# Altium PCB Jammer Circuit.PcbDoc
Units mil, origin at the board's own origin, x right, y up, seen from the top; angles counter-clockwise.
Board outline 2755.91 x 4724.41 mil, 2 copper layers (Top Layer, Bottom Layer); 52 components, 26 nets, 189 pads, 29 vias.
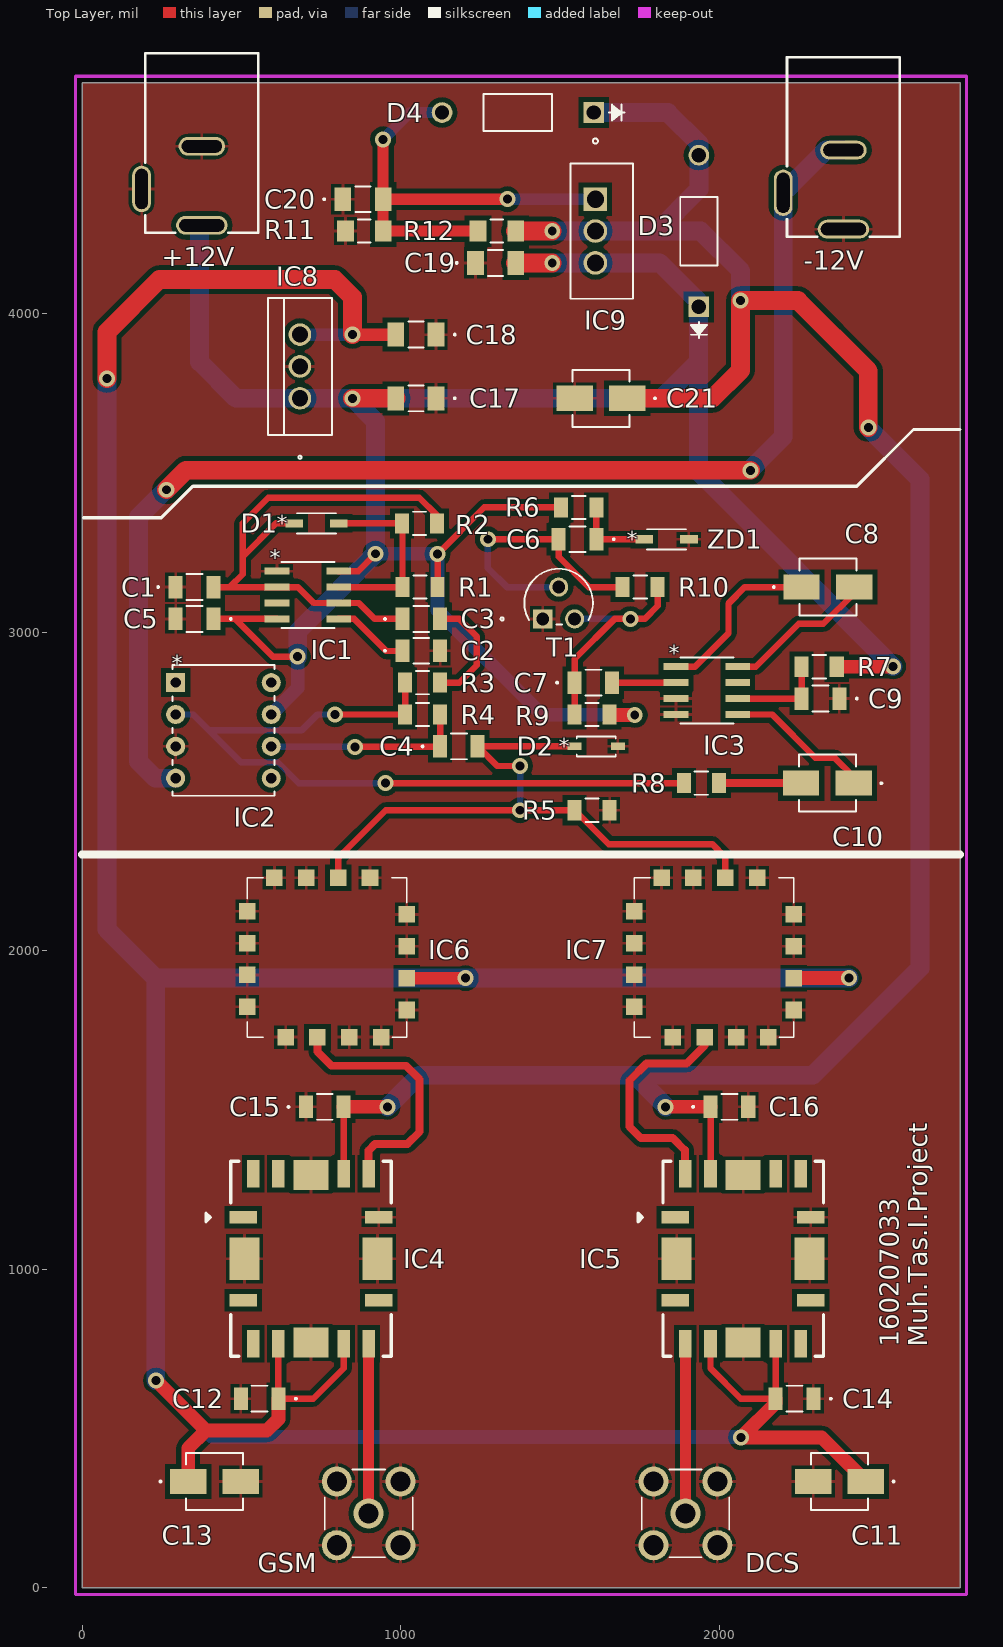
[diagram p0: Top Layer view]
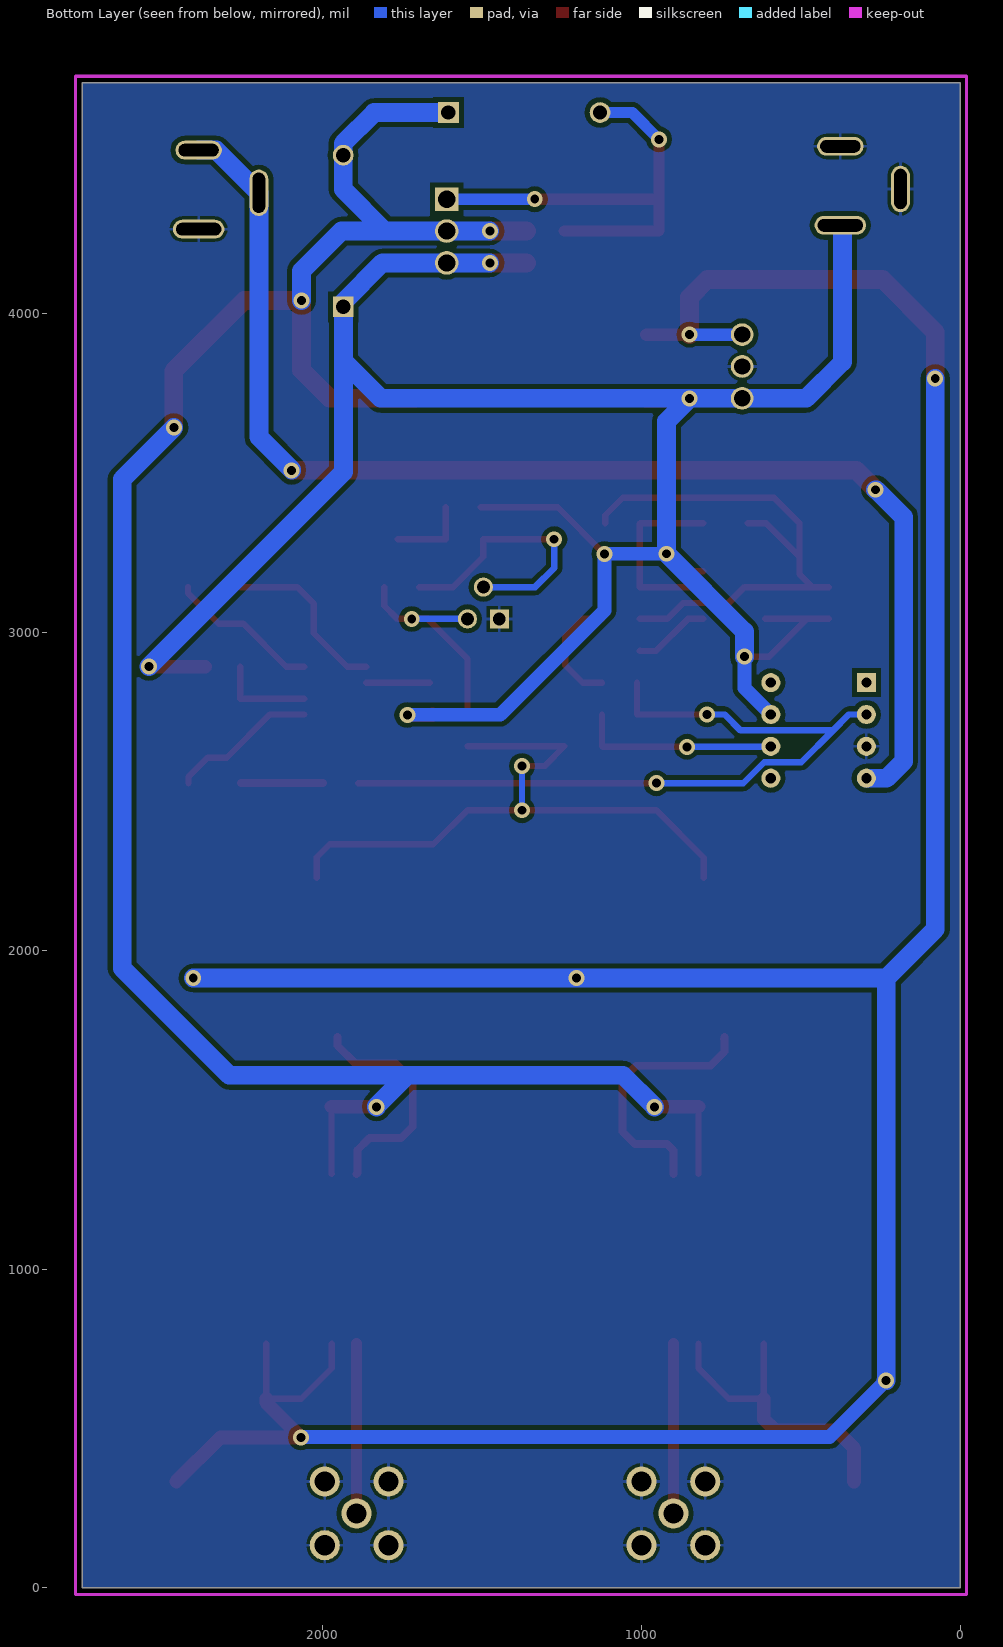
[diagram p1: Bottom Layer view, seen from below]
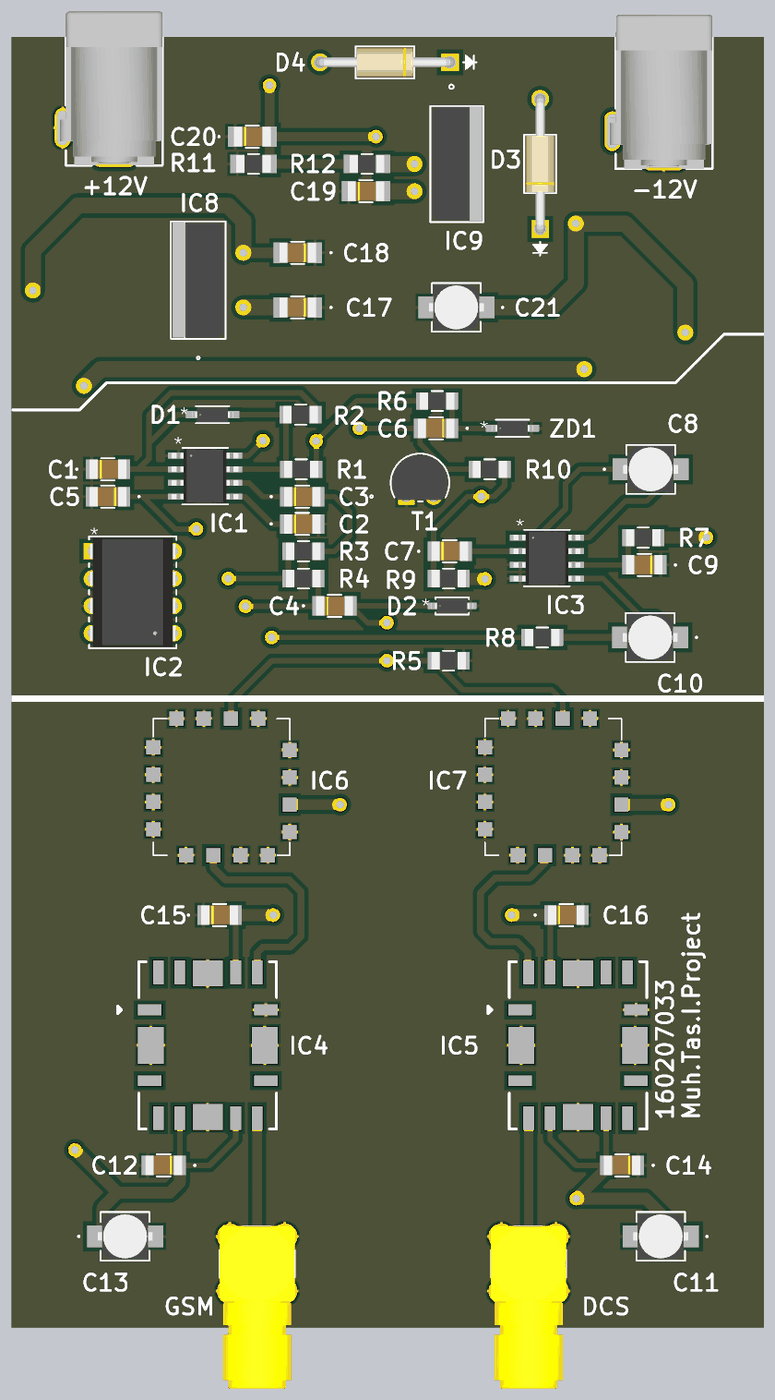
[diagram p2: 3D render of the assembled board from above, using the file's embedded part models]

## Layer stack, top to bottom
Top Solder: solder mask 0.4, Solder Resist, Dk 3.5
Top Layer: signal copper 1.4
Dielectric 1: dielectric 12.6, FR-4, Dk 4.8
Bottom Layer: signal copper 1.4
Bottom Solder: solder mask 0.4, Solder Resist, Dk 3.5

## Board outline
0,0 0,4724.41 2755.91,4724.41 2755.91,0

## Design rules (kind name [scope] priority, off if disabled: settings)
Clearance [All] p1: gap=10 ignorepadtopadclearanceinfootprint=FALSE except(0: Arc-Hole Track-Hole SMDPad-Hole THPad-Hole Via-Hole Fill-Hole Poly-Hole Region-Hole Text-Hole; 15: Arc-Poly Track-Poly SMDPad-Poly THPad-Poly Via-Poly Fill-Poly Poly-Poly Poly-Region Poly-Text)
PolygonConnect [All] p1: connectstyle=Relief reliefconductorwidth=10 reliefentries=4 polygonreliefangle="90 Angle" airgapwidth=10
RoutingVias [All] p1: holewidth=28 width=50 viastyle="Through Hole" minholewidth=28 minwidth=50 maxholewidth=28 maxwidth=50
SolderMaskExpansion [All] p1: expansion=4
Width GND [InNet('GND')] p1: maxlimit=78.74 minlimit=39.37 preferedwidth=43.31 minimp=50.000000 maximp=50.000000 favimp=50.000000
Width +12V [InNet('+12')] p2: maxlimit=59.06 minlimit=20 preferedwidth=43.31 minimp=50.000000 maximp=50.000000 favimp=50.000000
Width -12V [InNet('-12')] p3: maxlimit=59.06 minlimit=20 preferedwidth=43.31 minimp=50.000000 maximp=50.000000 favimp=50.000000
Width +5V [InNet('+5')] p4: maxlimit=59.06 minlimit=20 preferedwidth=43.31 minimp=50.000000 maximp=50.000000 favimp=50.000000
Width +2V2 [InNet('+2.2')] p5: maxlimit=59.06 minlimit=20 preferedwidth=43.31 minimp=50.000000 maximp=50.000000 favimp=50.000000
Width Default [All] p6: maxlimit=35 minlimit=20 preferedwidth=25 minimp=50.000000 maximp=50.000000 favimp=50.000000
30 further rules are at their usual default settings.

## Classes and differential pairs
component class "Power Circuit": +12V -12V C17 C18 C19 C20 D3 D4 IC8 IC9 R11 R12
component class "Jammer Circuit": C1 C2 C3 C4 C5 C6 C7 C8 C9 C11 C12 C13 C14 C15 C16 D1 D2 DCS GSM IC1 IC2 IC3 IC4 IC5 IC7 R1 R2 R3 R4 R5 R6 R7 R8 R9 R10 T1 ZD1

## Components (designator, comment, footprint, x,y, rotation, side; value= is the part's Value field where it differs from the comment)
+12V "DCJ250-10-A_XX-X_revA" DCJ250-10-A_XX-X_revA 376,4534.87 r180 top (schematic designator CON3)
-12V "DCJ250-10-A_XX-X_revA" DCJ250-10-A_XX-X_revA 2390,4522.87 r180 top (schematic designator CON4)
C1 "12062A270JAT2A" CAP_1206J 353,3141.52 r0 top value="0.1 µF"
C2 "12062A270JAT2A" CAP_1206J 1065,2941.52 r0 top value="1 nF"
C3 "12062A270JAT2A" CAP_1206J 1065,3041.52 r0 top value="0.1 µF"
C4 "12062A270JAT2A" CAP_1206J 1183,2641.52 r0 top value="0.1 µF"
C5 "12062A270JAT2A" CAP_1206J 353,3041.52 r180 top value="0.1 µF"
C6 "12062A270JAT2A" CAP_1206J 1555.17,3291.52 r180 top value="0.1 µF"
C7 "12062A270JAT2A" CAP_1206J 1605.17,2841.52 r0 top value="0.1 µF"
C8 "EEE-1CA221UP" CHEMI-D55-M 2341,3141.52 r0 top value="10 µF"
C9 "12062A270JAT2A" CAP_1206J 2318,2791.52 r180 top value="0.1 µF"
C10 "EEE-1CA221UP" CHEMI-D55-M 2339.5,2526 r180 top value="10 µF"
C11 "EEE-1CA221UP" CHEMI-D55-M 2377.96,334 r180 top value="4.7 µF"
C12 "12062A270JAT2A" CAP_1206J 557.28,594 r180 top value="100 pF"
C13 "EEE-1CA221UP" CHEMI-D55-M 415.78,334 r0 top value="4.7 µF"
C14 "12062A270JAT2A" CAP_1206J 2236.46,594 r180 top value="100 pF"
C15 "12062A270JAT2A" CAP_1206J 762,1510 r0 top value="100 pF"
C16 "12062A270JAT2A" CAP_1206J 2032.17,1510 r0 top value="100 pF"
C17 "12062A270JAT2A" CAP_1206J-M 1048.17,3734 r180 top value="0.33 µF"
C18 "12062A270JAT2A" CAP_1206J-M 1048.17,3934 r180 top value="0.1 µF"
C19 "12062A270JAT2A" CAP_1206J-M 1298,4159 r0 top value="0.1 µF"
C20 "12062A270JAT2A" CAP_1206J-M 882,4359 r0 top value="10 µF"
C21 "EEE-1CA221UP" CHEMI-D55-M 1629,3734 r180 top value="1 µF"
D1 "1N4148" SOD123-M 736.09,3341.52 r0 top
D2 "1N4148" SOD123 1614.09,2641.52 r0 top
D3 "1N4002" DO-204AL 1936.17,4259 r90 top value=Value
D4 "1N4002" DO-204AL 1368,4631 r180 top value=Value
DCS "SMA-J-P-H-RA-TH1" SAMTEC_SMA-J-P-H-RA-TH1 1894.09,234 r90 top (schematic designator CON1)
GSM "SMA-J-P-H-RA-TH1" SAMTEC_SMA-J-P-H-RA-TH1 899.74,234 r90 top (schematic designator CON2)
IC1 "NE555" D8 709,3116.52 r0 top value=Value
IC2 "LM741" J08A 594,2541.52 r0 top value=Value
IC3 "LM386" M08A 1961.17,2816.52 r0 top value=Value
IC4 "PF08109B" PCBComponent_1 718.64,1033.19 r90 top
IC5 "PF08109B" PCBComponent_1 2075.1,1033.19 r90 top
IC6 "CVCO55CL-0925-0970" XTAL_CVCO55CW-0925-970 519,2229 r270 top
IC7 "CVCO55BE-1785-1900" XTAL_CVCO55CW-0925-970 1734,2229 r270 top
IC8 "LM7805CT" TO-220 684,3934 r90 top value=Value
IC9 "LM317AT" T03B 1611.35,4259 r270 top value=Value
R1 "RC1206JR-071M1L" RC1206N 1061,3141.52 r180 top value="250 ?"
R2 "RC1206JR-071M1L" RC1206N 1059,3341.52 r0 top value="750 ?"
R3 "RC1206JR-071M1L" RC1206N 1069,2841.52 r0 top value="2 K?"
R4 "RC1206JR-071M1L" RC1206N 1069,2741.52 r0 top value="2 K?"
R5 "RC1206JR-071M1L" RC1206N 1601.17,2441 r0 top value="100 K?"
R6 "RC1206JR-071M1L" RC1206N 1559.17,3391.52 r0 top value="2 K?"
R7 "RC1206JR-071M1L" RC1206N 2314,2891.52 r180 top value="10 ?"
R8 "RC1206JR-071M1L" RC1206N 1944,2526 r0 top value="1 K?"
R9 "RC1206JR-071M1L" RC1206N 1601.17,2741.52 r180 top value="1 K?"
R10 "RC1206JR-071M1L" RC1206N 1752,3141.52 r180 top value="2 K?"
R11 "RC1206JR-071M1L" RC1206N-M 886,4259 r180 top value="180 ?"
R12 "RC1206JR-071M1L" RC1206N-M 1302,4259 r180 top value="240 ?"
T1 "2N3904" TO-92_2 1496.17,3091.52 r0 top value=Value
ZD1 "6V8" SOD123-M 1834.91,3291.52 r0 top value=Value

## Footprints (in the part's own frame and the unit in brackets; to place one, negate y for a bottom-side part, rotate by r counter-clockwise, add the part's x,y. Pads: shape width x height; smd on the part's side, far side on the other; paste and mask are expansions set on the pad)
CAP_1206J [mil]
  rect 44x71 smd paste+0 mask+0: 1(-59,0) 2(59,0)
  silkscreen extent -117,-40 25,40, body extent -67,-36 67,36, height 37
CAP_1206J-M [mil]
  rect 52x75 smd paste+0 mask+0: 1(-63,0) 2(63,0)
  silkscreen extent -125,-40 24,40, body extent -67,-36 67,36, height 37
CHEMI-D55-M [mil]
  rect 114x79 smd paste+0 mask+0: 1(-82.5,0) 2(82.5,0)
  silkscreen extent -172,-90 90,89, body extent -101,-84 101,84, height 207
D8 [mil]
  rect 78x22 smd paste+0 mask+0: 1(-97,75) 2(-97,25) 3(-97,-25) 4(-97,-75) 5(97,-75) 6(97,-25) 7(97,25) 8(97,75)
  silkscreen extent -84,-104 84,103, body extent -122,-99 122,99, height 69
DCJ250-10-A_XX-X_revA [mm] "DC Power Jack, Thru-Hole, Horizontal, with Locating Pegs, D2.5mm"
  oval 4.1x1.5 hole 1 slot 3.6 at 0 deg: 1(0,6.55)
  oval 3.7x1.5 hole 1 slot 3.2 at 0 deg: 2(0,0.25)
  oval 1.5x3.7 hole 1 slot 3.2 at 90 deg: 3(4.8,3.65)
  silkscreen extent -4.5,-7.15 4.5,7.15, body extent -4.5,-7.15 5.05,7.15, height 11
DO-204AL [mil]
  rect 65x65 hole 45 mask+0: 1(-238,0)
  round 65 hole 45 mask+0: 2(238,0)
  silkscreen extent -336,-59 108,59, body extent -255,-54 255,53, height 157
J08A [mil]
  rect 60x60 hole 32 mask+0: 1(-300,300)
  round 60 hole 32 mask+0: 2(-300,200) 3(-300,100) 4(-300,0) 5(0,0) 6(0,100) 7(0,200) 8(0,300)
  silkscreen extent -310,-55 10,355, body extent -307,-50 7,350, height 250
M08A [mil]
  rect 78x22 smd paste+0 mask+0: 1(-97,75) 2(-97,25) 3(-97,-25) 4(-97,-75) 5(97,-75) 6(97,-25) 7(97,25) 8(97,75)
  silkscreen extent -84,-104 84,104, body extent -122,-99 122,99, height 69
PCBComponent_1 [mm]
  rect 1x2.2 smd: 1(3.3,5.4) 2(-3.3,5.4) 7(-3.3,-5.4) 8(3.3,-5.4)
  rect 2.2x1 smd: 3(-6.775,4.6) 4(-6.775,2.6) 5(-6.775,-2.6) 6(-6.775,-4.6) 9(6.775,-4.6) 10(6.775,-2.6) 11(6.775,2.6) 12(6.775,4.6)
  rect 2.4x2.8 smd: GND(-6.675,0) GND(6.675,0)
  rect 3.4x2.4 smd: GND(0,5.3) GND(0,-5.3)
  silkscreen extent -7.77,-6.4 7.78,8.38, body extent -7.65,-6.27 7.65,6.28, height 1.8
RC1206N [mil]
  rect 44x63 smd paste+0 mask+0: 1(-55,0) 2(55,0)
  silkscreen extent -21,-36 21,36, body extent -63,-31 63,31, height 28
RC1206N-M [mil]
  rect 52x67 smd paste+0 mask+0: 1(-59,0) 2(59,0)
  silkscreen extent -20,-36 20,36, body extent -63,-31 63,31, height 28
SAMTEC_SMA-J-P-H-RA-TH1 [mm]
  round 2.4 hole 1.6: 1(0,0) 2(2.54,-2.54) 3(2.54,2.54) 4(-2.54,2.54) 5(-2.54,-2.54)
  silkscreen extent -3.5,-3.5 3.5,3.5, body extent -11.6,-3.5 3.5,3.5, height 11.12
SOD123 [mm]
  rect 1.111x0.601 smd paste+0 mask+0: 1(-1.725,0) 2(1.725,0)
  silkscreen extent -1.55,-0.8 1.55,0.8, body extent -1.92,-0.67 1.93,0.68, height 0.81
SOD123-M [mil]
  rect 55.75x25.65 smd paste+0 mask+0: 1(-69.91,0) 2(69.91,0)
  silkscreen extent -61,-32 61,32, body extent -76,-27 76,27, height 32
T03B [mil]
  rect 74x74 hole 54: 1(-100,0)
  round 74 hole 54: 2(0,0) 3(100,0)
  silkscreen extent -290,-78 213,118, body extent -207,-72 207,113, height 870
TO-92_2 [mil]
  rect 60x60 hole 40 mask+0: 1(-50,-50)
  round 60 hole 40 mask+0: 2(0,50) 3(50,-50)
  silkscreen extent -182,-68 108,107, body extent -103,-65 103,103, height 360
TO-220 [mil]
  round 71 hole 51 mask+0: 1(-200,0) 2(-100,0) 3(0,0)
  silkscreen extent -390,-100 115,100, body extent -310,-95 110,95, height 750
XTAL_CVCO55CW-0925-970 [mm]
  rect 1.32x1.32 smd: 1(0,9.779) 1(0,4.699) 1(0,2.159) 1(2.667,0) 1(2.921,12.7) 1(5.207,0) 1(5.461,12.7) 1(7.747,0) 1(10.287,0) 1(10.541,12.7) 1(12.7,8.128) 1(12.7,10.668) 1(12.7,3.048) 2(0,7.239) 10(12.7,5.588) 14(8.001,12.7)
  silkscreen extent -1.95,0 12.7,12.7, body extent 0,0 12.7,12.7, height 3.81

## Part data
+12V -12V: "DC Power Jack, Thru-Hole, Horizontal, with Locating Pegs, D2.5mm"
C1 C2 C3 C4 C5 C6 C7 C9 C12 C14 C15 C16 C17 C18 C19 C20 IC8 IC9 R1 R2 R3 R4 R5 R6 R7 R8 R9 R10 R11 R12 T1: "Imported", Built_By=EMA_UL_Team, RefDes=RefDes, Type=DEV
  C1 C2 C3 C4 C5 C6 C7 C9 C12 C14 C15 C16 C17 C18 C19 C20: Manufacturer_Part_Number=12062A270JAT2A, Vendor="AVX Corporation"
  IC8: C="Copyright (C) 2015 Accelerated Designs. All rights reserved", Manufacturer_Part_Number=LM7805CT, Vendor="Fairchild Semiconductor"
  IC9: C="Copyright (C) 2015 Accelerated Designs. All rights reserved", Manufacturer_Part_Number=LM317AT, Vendor="Texas Instruments"
  R1 R2 R3 R4 R5 R6 R7 R8 R9 R10 R11 R12: C="Copyright (C) 2015 Accelerated Designs. All rights reserved", Manufacturer_Part_Number=RC1206JR-071M1L, Vendor=Yageo
  T1: C="Copyright (C) 2015 Accelerated Designs. All rights reserved", Manufacturer_Part_Number=2N3904, Vendor="Fairchild Semiconductor"
C8 C10 C11 C13 C21: "Imported", Voltage=16V, C="Copyright (C) 2015 Accelerated Designs. All rights reserved", Copyright="Copyright (C) 2015 Accelerated Designs. All rights reserved", Manufacturer_Part_Number=EEE-1CA221UP, RefDes=RefDes, Type=DEV, Vendor=Panasonic
D1 D2: library part 1N4148W-13-F, Built_By=EMA_UL_Team, C="Copyright (C) 2015 Accelerated Designs. All rights reserved", Manufacturer_Part_Number=1N4148W-13-F, RefDes=RefDes, Type=DEV, Vendor="Diodes Inc"
D3 D4: library part 1N4002-E3/73, "Imported", Built_By=EMA_UL_Team, C="Copyright (C) 2015 Accelerated Designs. All rights reserved", Manufacturer_Part_Number=1N4002-E3/73, RefDes=RefDes, Type=DEV, Vendor=Vishay
DCS GSM: "Conn SMA F 0Hz to 6GHz 50Ohm Solder RA Thru-Hole Gold Tray", Package=None, Availability=Unavailable, MF="Samtec Inc.", MP=SMA-J-P-H-RA-TH1, Price=None, SnapEDA_Link=https://www.snapeda.com/parts/SMA-J-P-H-RA-TH1/Samtec%20Inc./view-part/?ref=snap
IC1: library part NE555DRG4, "Imported", Manufacturer="Texas Instruments", Built_By=EMA_UL_Team, C="Copyright (C) 2015 Accelerated Designs. All rights reserved", Manufacturer_Part_Number=NE555DRG4, RefDes=RefDes, Type=DEV, Vendor="Texas Instruments"
IC2: library part LM741J, "Imported", Built_By=EMA_UL_Team, C="Copyright (C) 2015 Accelerated Designs. All rights reserved", Manufacturer_Part_Number=LM741J, RefDes=RefDes, Type=DEV, Vendor="Texas Instruments"
IC3: library part LM386M-1/NOPB, "Imported", Built_By=EMA_UL_Team, C="Copyright (C) 2015 Accelerated Designs. All rights reserved", Manufacturer_Part_Number=LM386M-1/NOPB, RefDes=RefDes, Type=DEV, Vendor="Texas Instruments"
IC4 IC5: library part Amplifier
IC6: "Oscillator, VCO; Type, Narrow Band; 925-970MHz; 12.7x12.7mm SMD", Package="QFN-16 Crystek Crystals", Availability=Unavailable, MF="Crystek Corporation", MP=CVCO55CL-0925-0970, Price=None, SnapEDA_Link=https://www.snapeda.com/parts/CVCO55CL-0925-0970/Crystek%20Corporation/view-part/?ref=snap
IC7: library part CVCO55CL-0925-0970, "Oscillator, VCO; Type, Narrow Band; 925-970MHz; 12.7x12.7mm SMD", Package="QFN-16 Crystek Crystals", Availability=Unavailable, MF="Crystek Corporation", MP=CVCO55CL-0925-0970, Price=None, SnapEDA_Link=https://www.snapeda.com/parts/CVCO55CL-0925-0970/Crystek%20Corporation/view-part/?ref=snap
ZD1: library part MMSZ5221B-7, Built_By=EMA_UL_Team, C="Copyright (C) 2015 Accelerated Designs. All rights reserved", Manufacturer_Part_Number=MMSZ5221B-7, RefDes=RefDes, Type=DEV, Vendor="Diodes Inc"

## Via types
v1: diameter 50, hole 28, Top Layer to Bottom Layer, 29 vias

## Nets (pads, with @x,y where several pads share a name; then routed paths per layer and width w, separated by ;. In a path a pad name is that pad's centre, name@x,y a point inside that pad or via, vN(x,y) a via of type N, cw(c..) or ccw(c..) an arc to the next point about the centre after c; other vN are vias at no path point)
+2.2: C15.2 C16.1 C21.1 D3.2 D4.1 IC4.10 IC5.11 IC9.2 R12.1 | length 7285.9
  Top Layer w20: IC4.10 C15.2 ; IC5.11 1973.17,1300.35 C16.1
  Top Layer w43.31: C15.2 v1(959,1510) ; v1(1832,1510) C16.1
  Top Layer w59.06: R12.1 v1(1476,4259) ; C21.1 1979,3734 2067,3822 v1(2067,4041) 2247,4041 2468,3820 v1(2468,3642)
  Bottom Layer w59.06: v1(959,1510) 1058,1609 1735,1609 ; v1(1476,4259) IC9.2 1805,4259 ; D4.1 1839.17,4631 1936.17,4534 D3.2 1936.17,4390.17 1805,4259 ; v1(1832,1510) 1832,1512 1735,1609 ; v1(2067,4041) 2067,4134 1942,4259 1805,4259 ; v1(2468,3642) 2630,3480 2630,1945 2294,1609 1735,1609
+5: C11.1 C12.1 C13.1 C14.2 C18.2 IC4.4 IC4.5 IC5.4 IC5.5 IC6.14 IC7.14 IC8.3 | length 11393.2
  Top Layer w20: IC4.4 C12.1 725.68,594 821,689.32 IC4.5 ; IC5.4 1972.74,689.32 2068.06,594 C14.2 IC5.5
  Top Layer w39.37: v1(849,3934) C18.2 ; IC6.14 v1(1204,1914)
  Top Layer w43.31: v1(232.28,650.59) 388.78,494.09 ; C13.1 333.28,438.59 388.78,494.09 ; C12.1 616.28,530.65 579.72,494.09 388.78,494.09 ; C14.2 2177.46,581.01 v1(2068.9,472.44) 2322.02,472.44 C11.1 ; IC7.14 v1(2407,1914)
  Top Layer w59.06: v1(78,3796) 78,3942 243,4107 793,4107 849,4051 v1(849,3934)
  Bottom Layer w39.37: IC8.3 v1(849,3934)
  Bottom Layer w43.31: v1(232.28,650.59) 409.45,473.43 2067.91,473.43 v1(2068.9,472.44)
  Bottom Layer w59.06: v1(78,3796) 78,3647 78,2067.67 231.67,1914 ; v1(232.28,650.59) 231.67,651.2 231.67,1914 ; v1(2407,1914) v1(1204,1914) 231.67,1914
+12: +12V.1 C5.1 C17.2 C19.2 D3.1 IC1.4 IC1.8 IC2.7 IC8.1 IC9.3 R1.1 R6.1 R7.1 R9.1 | length 7930.3
  Top Layer w20: C5.1 481,3041.52 ; IC1.4 481,3041.52 ; v1(677,2923) 599.52,2923 481,3041.52 ; IC1.8 866.52,3191.52 v1(921,3246) ; R1.1 v1(1116,3245) 1262.52,3391.52 R6.1
  Top Layer w43.31: R9.1 1657.69,2740 v1(1735,2740) ; R7.1 2545.52,2891.52 v1(2546,2892)
  Top Layer w59.06: v1(849,3734) C17.2 ; C19.2 v1(1476,4159)
  Bottom Layer w43.31: IC2.7 677,2824.52 v1(677,2923) ; v1(921,3246) 1115,3246 v1(1116,3245) 1116,3068 1443,2741 1734,2741 v1(1735,2740)
  Bottom Layer w59.06: +12V.1 369,4270 369,3848 483,3734 IC8.1 v1(849,3734) ; v1(677,2923) 677,3002 v1(921,3246) 921,3662 v1(849,3734) ; v1(1476,4159) IC9.3 1813,4159 1935.17,4036.83 D3.1@1935.17,4020 ; D3.1 D3.1@1935.17,4020 ; v1(2546,2892) 1935.17,3502.83 1935.17,3850.17 ; v1(849,3734) 1819,3734 1935.17,3850.17 ; 1935.17,3850.17 D3.1@1935.17,4020
-12: -12V.2 -12V.3 IC2.4 | length 4045.3
  Top Layer w59.06: v1(265,3447) 326,3508 v1(2098,3508)
  Bottom Layer w59.06: v1(265,3447) 263,3447 177,3361 177,2595 230.48,2541.52 IC2.4 ; v1(2098,3508) 2098,3510 2201.02,3613.02 -12V.3 2334.88,4513.03 -12V.2
GND: +12V.2 +12V.3 -12V.1 C1.1 C2.2 C5.2 C9.1 C11.2 C12.2 C13.2 C14.1 C15.1 C16.2 C17.1 C18.1 C19.1 C20.1 C21.2 D2.2 DCS.2 DCS.3 DCS.4 DCS.5 GSM.2 GSM.3 GSM.4 GSM.5 IC1.1 IC2.3 IC3.3 IC3.4 IC4.8 IC4.GND IC5.8 IC5.GND IC6.1 IC7.1 IC8.2 R5.2 R11.2 T1.1 ZD1.2
NetC1_2: C1.2 C3.1 D1.1 IC1.2 IC1.6 R2.2 | length 1745.8
  Top Layer w20: C1.2 464,3141.52 504,3181.52 504,3236.52 ; 466.76,3141.52 IC1.2 676.82,3141.52 726.82,3091.52 IC1.6 869,3091.52 919,3041.52 C3.1 ; D1.1 609,3341.52 504,3236.52 ; R2.2 1114,3366.52 1059,3421.52 584,3421.52 504,3341.52 504,3236.52
NetC2_1: C2.1 IC1.5 | length 242
  Top Layer w20: IC1.5 854,3041.52 954.76,2940.76 1005.24,2940.76 C2.1
NetC3_2: C3.2 R3.2 | length 365.6
  Top Layer w20: R3.2 1184,2841.52 1239,2896.52 1239,2986.52 1184,3041.52 C3.2
NetC4_1: C4.1 IC2.6 R4.2 | length 631.3
  Top Layer w20: v1(857,2640) 1122.48,2640 C4.1 R4.2
  Bottom Layer w20: IC2.6 595.52,2640 v1(857,2640)
NetC4_2: C4.2 D2.1 IC6.2 IC7.2 R5.1 | length 2067.3
  Top Layer w20: IC6.2 804,2292 953,2441 v1(1375,2441) R5.1 1653.17,2334 1979,2334 2019,2294 IC7.2 ; v1(1375,2580) 1303.52,2580 C4.2 D2.1
  Bottom Layer w20: v1(1375,2441) v1(1375,2580)
NetC6_1: C6.1 R6.2 ZD1.1 | length 250.8
  Top Layer w20: R6.2 C6.1 ZD1.1
NetC6_2: C6.2 R10.2 T1.2 | length 854.5
  Top Layer w20: v1(1274,3291.52) C6.2 1496.17,3236.35 1591,3141.52 R10.2
  Bottom Layer w20: v1(1274,3291.52) 1274,3201.52 1334,3141.52 T1.2
NetC7_1: C7.1 R9.2 R10.1 T1.3 | length 738.4
  Top Layer w20: R9.2 C7.1 1546.17,2916.52 1671.17,3041.52 v1(1721,3041.52) 1766,3041.52 1807,3082.52 R10.1
  Bottom Layer w20: T1.3 v1(1721,3041.52)
NetC7_2: C7.2 IC3.2 | length 200
  Top Layer w20: C7.2 IC3.2
NetC8_1: C8.1 IC3.1 | length 552.7
  Top Layer w20: IC3.1 1924,2891.52 2029,2996.52 2029,3090.02 2080.5,3141.52 C8.1
NetC8_2: C8.2 IC3.8 | length 480
  Top Layer w20: IC3.8 2114.78,2891.52 2249.26,3026 2327,3026 2423.5,3122.5 C8.2
NetC9_2: C9.2 IC3.6 R7.2 | length 300.8
  Top Layer w20: IC3.6 C9.2 R7.2
NetC10_1: C10.1 IC3.5 | length 464.8
  Top Layer w20: IC3.5 2166.26,2741.52 2301.78,2606 2362,2606 2422,2546 C10.1
NetC10_2: C10.2 R8.2 | length 258
  Top Layer w25: R8.2 C10.2
NetC20_2: C20.2 D4.2 IC9.1 R11.1 R12.2 | length 1472.1
  Top Layer w35: v1(945,4547) C20.2 ; R12.2 R11.1 C20.2 ; v1(1335,4359) C20.2
  Bottom Layer w35: v1(945,4547) 1029,4631 D4.2 ; v1(1335,4359) IC9.1
NetCON1_1: DCS.1 IC5.3 | length 532.5
  Top Layer w35: IC5.3 1894.09,766.36 DCS.1
NetCON2_1: GSM.1 IC4.6 | length 532.5
  Top Layer w35: GSM.1 IC4.6
NetD1_2: D1.2 IC1.7 R1.2 R2.1 | length 596.8
  Top Layer w20: IC1.7 R1.2@1004,3141.52 ; D1.2 R2.1 1006,3339.52 R1.2
NetIC2_2: IC2.2 R3.1 R4.1 R8.1 | length 2420
  Top Layer w20: v1(794,2741.52) R4.1 R3.1 ; v1(953,2526) R8.1
  Bottom Layer w20: IC2.2 349,2741.52 399,2691.52 ; v1(794,2741.52) 739,2741.52 689,2691.52 399,2691.52 ; v1(953,2526) 680.23,2526 614.71,2591.52 499,2591.52 399,2691.52
NetIC4_9: IC4.9 IC6.10 | length 831.7
  Top Layer w20: IC6.10 IC6.10@744,1724
  Top Layer w25: IC6.10 739,1683 783,1639 1017,1639 1060,1596 1060,1432 1021,1393 920,1393 899.74,1372.74 IC4.9
NetIC5_12: IC5.12 IC7.10 | length 732.1
  Top Layer w25: IC5.12 1892,1301.92 1892,1374 1854,1412 1754,1412 1718,1448 1718,1592 1772,1646 1898,1646 1954,1702 IC7.10
pads on no net: IC1.3 IC2.1 IC2.5 IC2.8 IC3.7 IC4.1 IC4.2 IC4.3 IC4.7 IC4.11 IC4.12 IC5.1 IC5.2 IC5.6 IC5.7 IC5.9 IC5.10

## Polygon pours and split planes (outlines as drawn)
GND on Bottom Layer "Bottom Layer-GND" (solid, pour order 30): 0,0 0,4724.41 2755.91,4724.41 2755.91,0
GND on Bottom Layer "Bottom Layer-GND 1" (solid, pour order 16): 0,4759
GND on Top Layer "Top Layer-GND" (solid, pour order 28): 0,0 0,4724.41 2755.91,4724.41 2755.91,0

## Keep-outs
Keep-Out Layer:
  lines w10: -20.53,-20.72 -20.53,4745.02 2776.33,4745.02 2776.33,10.09 2776.57,9.84 2776.57,-20.72 2746.12,-20.72 -20.53,-20.72

## Silkscreen, mask and mechanical layers (free items; w line width, h text height)
Top Overlay:
  lines w10: 5,3359 249,3359 348,3458 2432,3458 2610,3636 2755,3636
  lines w25: 0,2302.17 2755.91,2302.17
  text "160207033 / Muh.Tas.I.Project" at 2653,757 h60 r90

## Text inside footprints (layer, text, board x,y; h text height)
D1: Top Overlay "*" at 610.8,3316.52 h50; Mechanical 13 "*" at 677.48,3316.52 h50
D2: Top Overlay "*" at 1496.8,2616.52 h50; Mechanical 13 "*" at 1555.48,2616.52 h50
IC1: Top Overlay "*" at 589.5,3208.52 h50; Mechanical 13 "*" at 633,3162.02 h50
IC2: Top Overlay "*" at 281.5,2876.52 h50; Mechanical 13 "*" at 286.5,2816.52 h50
IC3: Top Overlay "*" at 1841.67,2908.52 h50; Mechanical 13 "*" at 1885.17,2862.02 h50
IC8: Mechanical 13 "TAB" at 626.42,3815.25 h25 r90
ZD1: Top Overlay "*" at 1709.63,3266.52 h50; Mechanical 13 "*" at 1776.31,3266.52 h50